# Altium PCB IMX291.PcbDoc
Units mil, origin at the board's own origin, x right, y up, seen from the top; angles counter-clockwise.
Board outline 2450 x 2235 mil, 2 copper layers (Top Layer, Bottom Layer); 66 components, 59 nets, 401 pads, 106 vias.
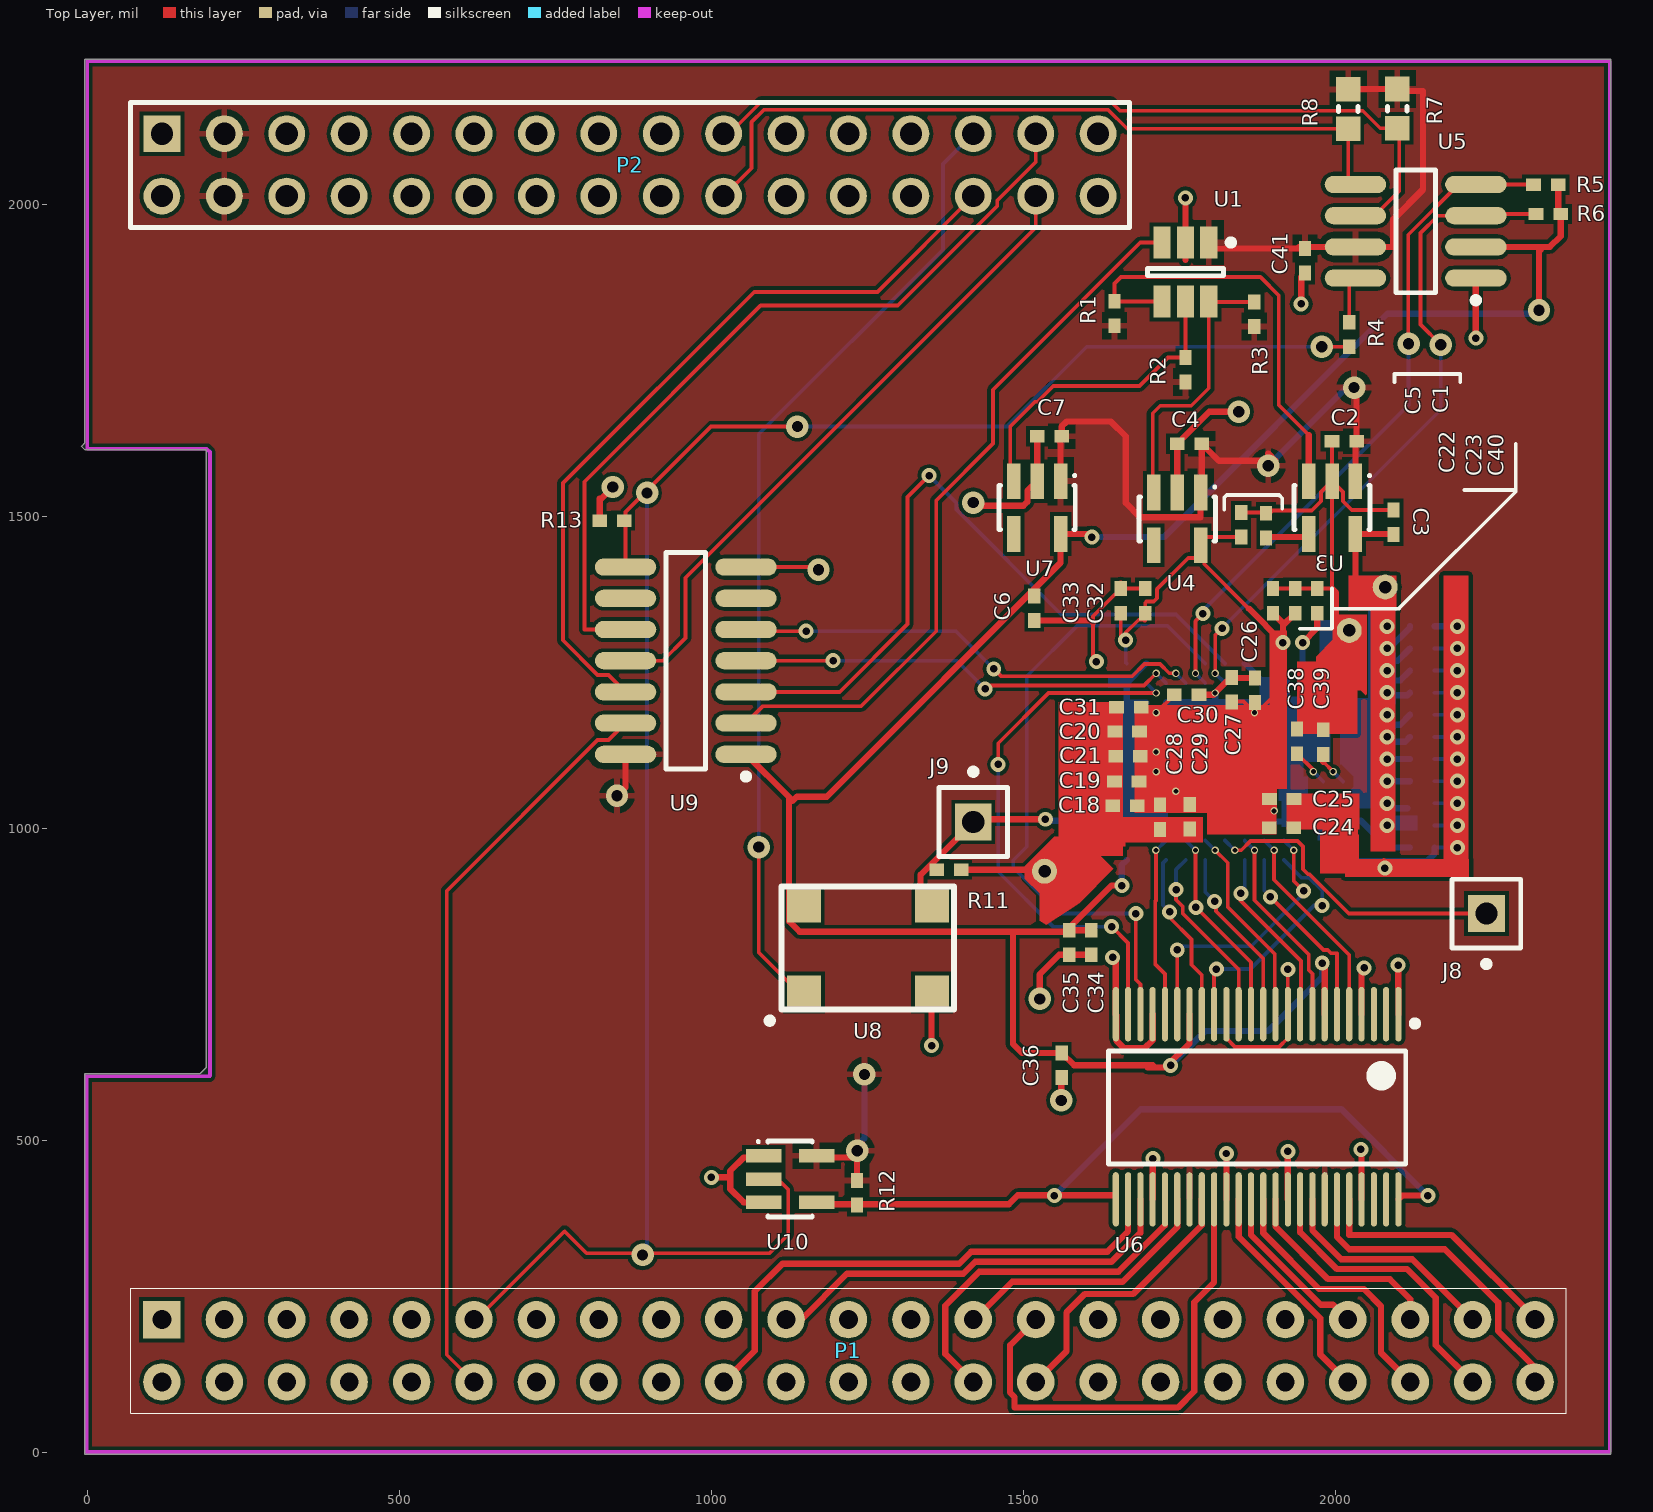
[diagram p0: Top Layer view]
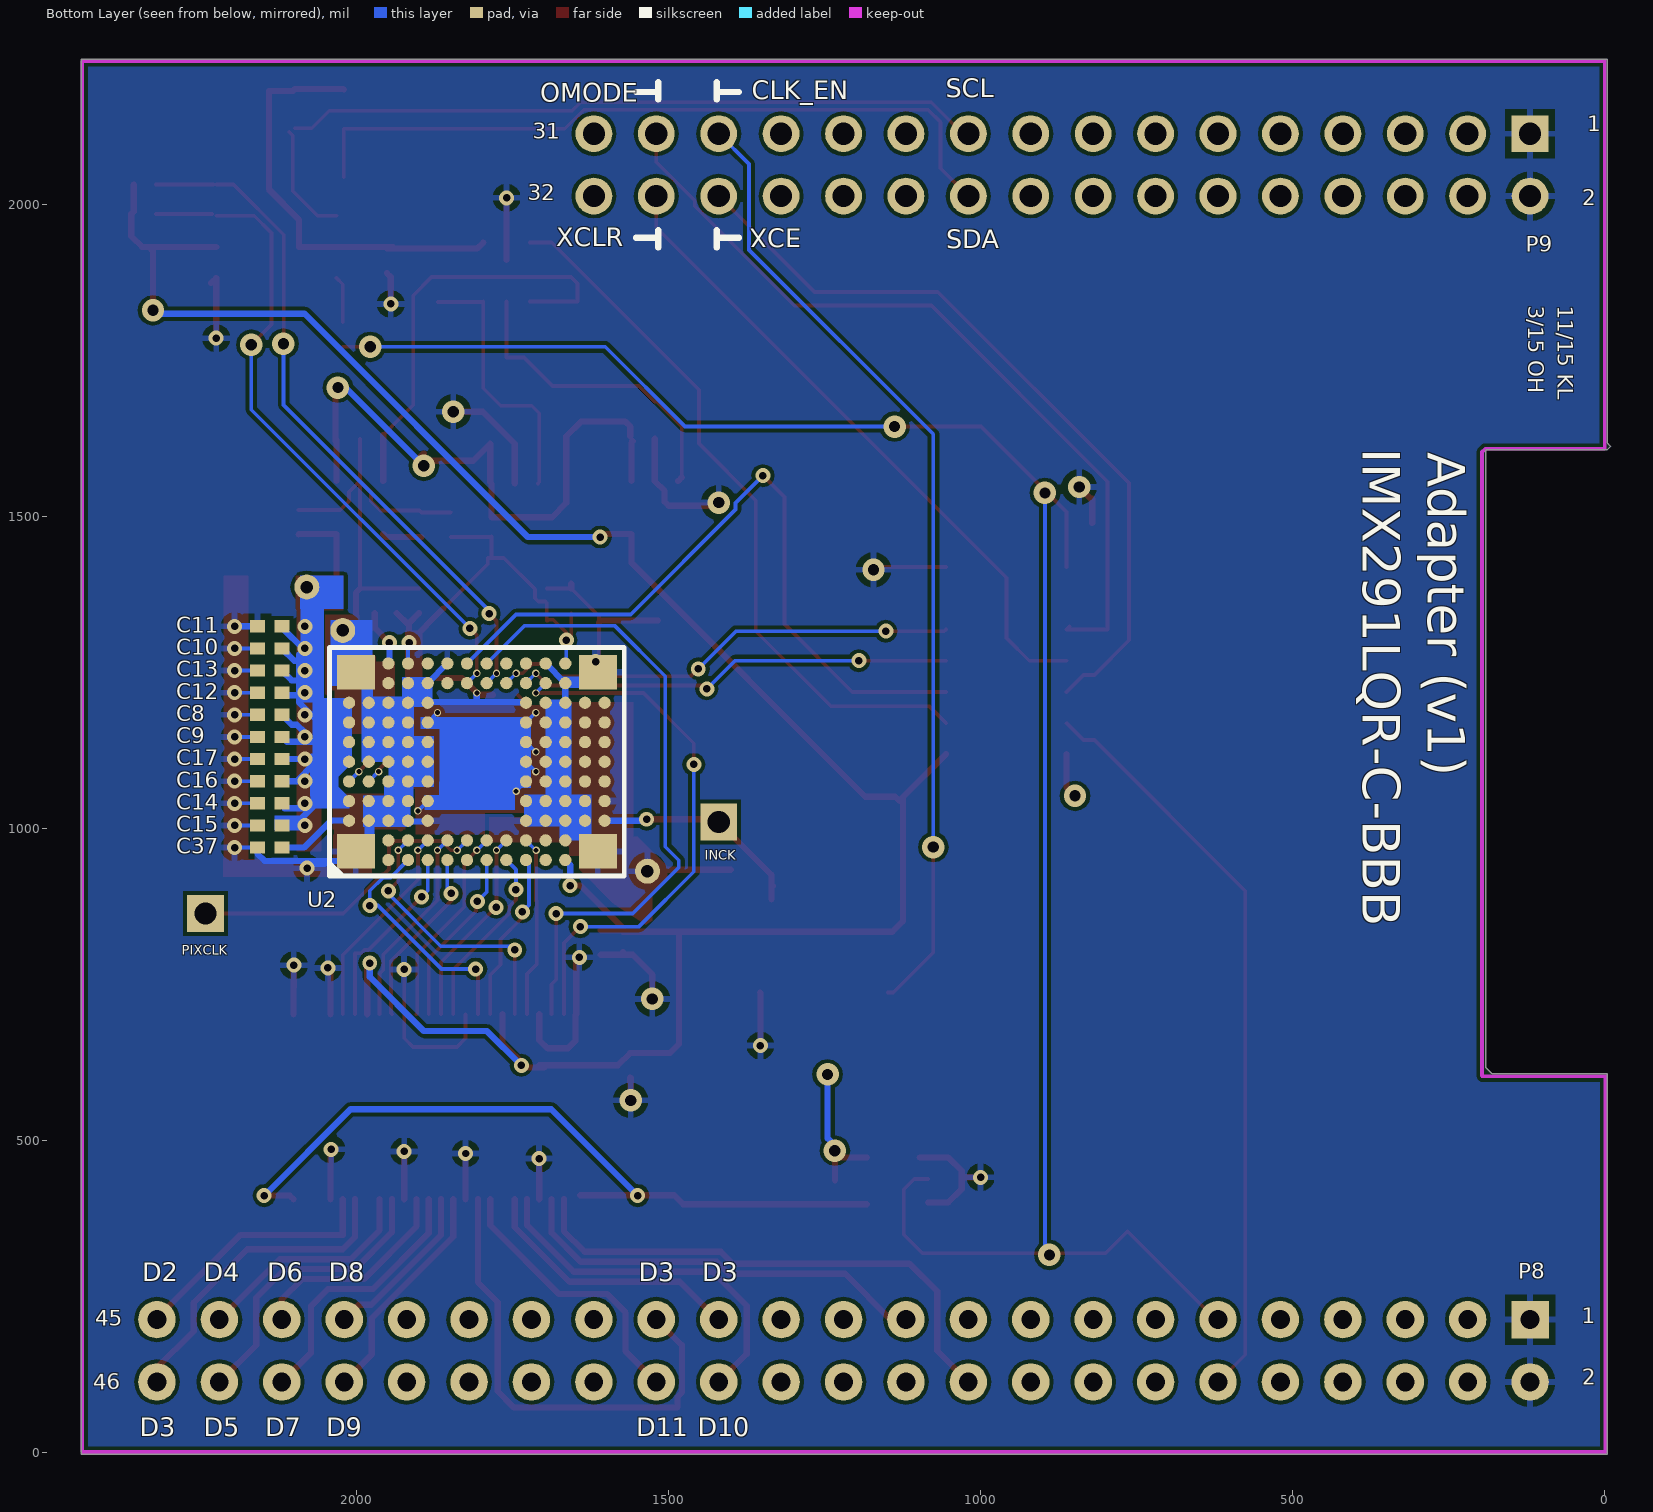
[diagram p1: Bottom Layer view, seen from below]

## Layer stack, top to bottom
Top Solder: solder mask 0.4, Solder Resist, Dk 3.5
Top Layer: signal copper 1.4
Dielectric 1: dielectric 12.6, FR-4, Dk 4.8
Bottom Layer: signal copper 1.4
Bottom Solder: solder mask 0.4, Solder Resist, Dk 3.5

## Board outline
2441.04,2231.97 2441.04,-3.03 -3.96,-3.03 -3.96,606.97 181.04,606.97 191.04,616.97 191.04,1606.97 -3.96,1606.97 -8.96,1611.97 -3.96,1616.97 -3.96,2231.97

## Design rules (kind name [scope] priority, off if disabled: settings)
Clearance [All] p1: gap=6
ComponentClearance [All] p1: gap=2 collisioncheckmode=3 verticalgap=10 showdistances=TRUE
HoleSize [All] p1: absolutevalues=TRUE maxlimit=100 minlimit=12 maxpercent=80.000 minpercent=20.000
MinimumAnnularRing [All] p1: minimumring=6
MinimumSolderMaskSliver [All] p1: minsoldermaskwidth=5
PolygonConnect [All] p1: connectstyle=Relief reliefconductorwidth=10 reliefentries=4 polygonreliefangle="90 Angle" airgapwidth=10
RoutingVias [All] p1: holewidth=28 width=50 viastyle="Through Hole" minholewidth=28 minwidth=50 maxholewidth=28 maxwidth=50
SolderMaskExpansion [All] p1: expansion=4
Width [All] p1: maxlimit=10 minlimit=6 preferedwidth=10
26 further rules are at their usual default settings.

## Components (designator, comment, footprint, x,y, rotation, side; value= is the part's Value field where it differs from the comment)
C1 "10nF" 0402#1 1889,1485 r90 top
C2 "1uF" 0402#1 2014.48,1620.31 r180 top
C3 "1uF" 0402#1 2093.22,1490.39 r270 top
C4 "1uF" 0402#1 1766.45,1616.38 r180 top
C5 "1uF" 0402#1 1849.12,1486.45 r270 top
C6 "1uF" 0402#1 1517.72,1352.76 r90 top
C7 "1uF" 0402#1 1542.04,1628.19 r180 top
C8 "0.1uF" 0402#1 2139.37,1181.89 r0 bottom
C9 "1.0uF" 0402#1 2139.37,1146.46 r0 bottom
C10 "0.1uF" 0402#1 2139.37,1288.19 r180 bottom
C11 "4.7uF" 0402#1 2139.37,1323.62 r180 bottom
C12 "0.1uF" 0402#1 2139.37,1217.32 r180 bottom
C13 "4.7uF" 0402#1 2139.37,1252.76 r180 bottom
C14 "4.7uF" 0402#1 2139.37,1040.16 r180 bottom
C15 "0.1uF" 0402#1 2139.37,1004.72 r180 bottom
C16 "4.7uF" 0402#1 2139.37,1075.59 r180 bottom
C17 "0.1uF" 0402#1 2139.37,1111.02 r180 bottom
C18 "0.01uF" 0402#1 1662.99,1036.22 r0 top
C19 "1.0uF" 0402#1 1665.75,1075.2 r0 top
C20 "0.01uF" 0402#1 1666.54,1155.12 r0 top
C21 "1.0uF" 0402#1 1667.72,1115.35 r0 top
C22 "0.1uF" 0402#1 1900.3,1364.41 r270 top
C23 "4.7uF" 0402#1 1935.74,1364.41 r270 top
C24 "0.1uF" 0402#1 1913.78,1001.18 r180 top
C25 "4.7uF" 0402#1 1914.08,1047.08 r180 top
C26 "0.1uF" 0402#1 1871.26,1221.26 r270 top
C27 "4.7uF" 0402#1 1834.25,1222.05 r270 top
C28 "0.1uF" 0402#1 1719.2,1017.95 r90 top
C29 "4.7uF" 0402#1 1766.93,1018.5 r90 top
C30 "0.1uF" 0402#1 1761.81,1214.17 r180 top
C31 "4.7uF" 0402#1 1669.29,1194.09 r0 top
C32 "0.1uF" 0402#1 1695.58,1364.41 r270 top
C33 "4.7uF" 0402#1 1656.21,1364.41 r270 top
C34 ".01uF" 0402#1 1608.96,817.16 r270 top
C35 "4.7uF" 0402#1 1573.53,817.16 r270 top
C36 "18pF" 0402#1 1561.72,620.31 r90 top
C37 "1uF" 0402#1 2139.37,969.29 r0 bottom
C38 "1uF" 0402#1 1938.58,1139.37 r90 top
C39 "1uF" 0402#1 1980.71,1138.19 r90 top
C40 "0.22uF" 0402#1 1971.17,1364.41 r90 top
C41 "1uF" 0402#2 1951.58,1909.33 r270 top
J8 "PIXCLK" PIN1 2242,863.39 r180 top
J9 "INCK" PIN1 1419.99,1010.08 r0 top
P1 "P8" HEADER23X2 1220,162.97 r0 top
P2 "P9" HDR2X16 120,2112.97 r0 top
R1 "100k" 0402#1 1646.06,1824.8 r270 top
R2 "100k" 0402#2 1759.84,1734.65 r90 top
R3 "100k" 0402#1 1870.08,1823.62 r270 top
R4 "200k" 0402#1 2022.44,1791.22 r90 top
R5 "1k" 0402#1 2337.4,2031.38 r0 top
R6 "1k" 0402#1 2341.34,1984.14 r0 top
R7 "10k" 0603 2099.22,2153.04 r270 top
R8 "10k" 0603 2020.59,2152.4 r270 top
R11 "1K" 0402#1 1381.1,933.86 r180 top
R12 "1K" 0402#1 1233.67,416.22 r90 top
R13 "1K" 0402#1 841.25,1492.99 r0 top
U1 "LM3880" SOT23-6_M 1759.84,1891.34 r270 top
U2 "IMX291" "LGA110C80P14X11_1200X930X350 -Back View" 1807.48,1106.69 r180 top
U3 "LP3985_2.9" DBV005 1994.79,1514.01 r180 top
U4 "LP3990_1.2" DBV005 1746.76,1495.67 r180 top
U5 "PCA9306" D008_M 2128.74,1956.58 r180 top
U6 "SN74AVCH16T245" TSSOP48 2101.09,687.24 r270 top
U7 "LP3990_1.8" DBV005 1522.35,1514.01 r180 top
U8 "DSC1001" DSC1001 1283.87,781.9 r180 top
U9 "TXB0104" TSSOP14_M 959.36,1268.58 r180 top
U10 "SN74LVC1G04" DBV005 1126.58,438.04 r270 top

## Footprints (in the part's own frame and the unit in brackets; to place one, negate y for a bottom-side part, rotate by r counter-clockwise, add the part's x,y. Pads: shape width x height; smd on the part's side, far side on the other; paste and mask are expansions set on the pad)
0402#1 [mm] "Chip Capacitor, Body 1.0x0.5mm, IPC High Density"
  rect 0.6x0.5 smd: 1(-0.5,0) 2(0.5,0)
  body extent -0.55,-0.3 0.55,0.3, height 1.3
0402#2 [mm] "Chip Capacitor, Body 1.0x0.5mm, IPC High Density"
  rect 0.6x0.5 smd: 1(0.5,0) 2(-0.5,0)
  body extent -0.55,-0.3 0.55,0.3, height 1.3
0603 [mm] "Chip Capacitor, 2-Leads, Body 1.6x0.8mm, IPC Medium Density"
  rect 1x1 smd: 1(-0.8,0) 2(0.8,0)
  silkscreen extent -0.1,-0.4 0.1,0.4, body extent -0.9,-0.5 0.9,0.5, height 0.87
D008_M [mm] "8-Pin Small Outline Integrated Circuit 1.27 mm Pitch, IPC Low Density"
  oval 2.5x0.7 smd: 1(-2.45,1.905) 2(-2.45,0.635) 3(-2.45,-0.635) 4(-2.45,-1.905) 5(2.45,-1.905) 6(2.45,-0.635) 7(2.45,0.635) 8(2.45,1.905)
  silkscreen extent -2.58,-2.5 0.8,2.93, body extent -2,-2.5 2,2.5, height 1.75
DBV005 [mm] "SOT-23/SC-74A; 5 Leads; Body 3 x 3 mm, inc. leads (LxW max)"
  rect 0.55x1.45 smd: 1(-0.95,-1.075) 2(0,-1.075) 3(0.95,-1.075) 4(0.95,1.075) 5(-0.95,1.075)
  silkscreen extent -1.58,-1.35 1.55,0.9
DSC1001 [mil]
  rect 55x55 smd paste+0 mask+0: 1(135,45) 2(-70,45) 3(-70,-95) 4(135,-95)
  Top Overlay keep-out lines w10: 171,72 -105,72 -105,-125 171,-125 171,72
  silkscreen extent -105,-125 195,95
HDR2X16 [mm] "Connector; Header; 16x2 Position"
  rect 1.5x1.5 hole 0.9: 1(0,0)
  round 1.5 hole 0.9: 2(0,-2.54) 3(2.54,0) 4(2.54,-2.54) 5(5.08,0) 6(5.08,-2.54) 7(7.62,0) 8(7.62,-2.54) 9(10.16,0) 10(10.16,-2.54) 11(12.7,0) 12(12.7,-2.54) 13(15.24,0) 14(15.24,-2.54) 15(17.78,0) 16(17.78,-2.54) 17(20.32,0) 18(20.32,-2.54) 19(22.86,0) 20(22.86,-2.54) 21(25.4,0) 22(25.4,-2.54) 23(27.94,0) 24(27.94,-2.54) 25(30.48,0) 26(30.48,-2.54) 27(33.02,0) 28(33.02,-2.54) 29(35.56,0) 30(35.56,-2.54) 31(38.1,0) 32(38.1,-2.54)
  silkscreen extent -1.27,-3.81 39.37,1.27
HEADER23X2 [mil] "HEADER23X2"
  rect 60x60 hole 30 mask+2: 1(-1100,50)
  round 60 hole 30 mask+2: 2(-1100,-50) 3(-1000,50) 4(-1000,-50) 5(-900,50) 6(-900,-50) 7(-800,50) 8(-800,-50) 9(-700,50) 10(-700,-50) 11(-600,50) 12(-600,-50) 13(-500,50) 14(-500,-50) 15(-400,50) 16(-400,-50) 17(-300,50) 18(-300,-50) 19(-200,50) 20(-200,-50) 21(-100,50) 22(-100,-50) 23(0,50) 24(0,-50) 25(100,50) 26(100,-50) 27(200,50) 28(200,-50) 29(300,50) 30(300,-50) 31(400,50) 32(400,-50) 33(500,50) 34(500,-50) 35(600,50) 36(600,-50) 37(700,50) 38(700,-50) 39(800,50) 40(800,-50) 41(900,50) 42(900,-50) 43(1000,50) 44(1000,-50) 45(1100,50) 46(1100,-50)
  silkscreen extent -1150,-100 1150,100
"LGA110C80P14X11_1200X930X350 -Back View" [mm]
  rect 1.55x1.4 smd far side: 1(-4.925,3.65) 9(-4.925,-3.65) 106(4.925,3.65) 114(4.925,-3.65)
  round 0.5 smd far side: 2(-5.2,2.4) 3(-5.2,1.6) 4(-5.2,0.8) 5(-5.2,0) 6(-5.2,-0.8) 7(-5.2,-1.6) 8(-5.2,-2.4) 10(-4.4,2.4) 11(-4.4,1.6) 12(-4.4,0.8) 13(-4.4,0) 14(-4.4,-0.8) 15(-4.4,-1.6) 16(-4.4,-2.4) 17(-3.6,4) 18(-3.6,3.2) 19(-3.6,2.4) 20(-3.6,1.6) 21(-3.6,0.8) 22(-3.6,0) 23(-3.6,-0.8) 24(-3.6,-1.6) 25(-3.6,-2.4) 26(-3.6,-3.2) 27(-3.6,-4) 28(-2.8,4) 29(-2.8,3.2) 30(-2.8,2.4) 31(-2.8,1.6) 32(-2.8,0.8) 33(-2.8,0) 34(-2.8,-0.8) 35(-2.8,-1.6) 36(-2.8,-2.4) 37(-2.8,-3.2) 38(-2.8,-4) 39(-2,4) 40(-2,3.2) 41(-2,2.4) 42(-2,1.6) 43(-2,0.8) 44(-2,0) 45(-2,-0.8) 46(-2,-1.6) 47(-2,-2.4) 48(-2,-3.2) 49(-2,-4) 50(-1.2,4) 51(-1.2,3.2) 52(-1.2,-3.2) 53(-1.2,-4) 54(-0.4,4) 55(-0.4,3.2) 56(-0.4,-3.2) 57(-0.4,-4) 58(0.4,4) 59(0.4,3.2) 60(0.4,-3.2) 61(0.4,-4) 62(1.2,4) 63(1.2,3.2) 64(1.2,-3.2) 65(1.2,-4) 66(2,4) 67(2,3.2) 68(2,2.4) 69(2,1.6) 70(2,0.8) 71(2,0) 72(2,-0.8) 73(2,-1.6) 74(2,-2.4) 75(2,-3.2) 76(2,-4) 77(2.8,4) 78(2.8,3.2) 79(2.8,2.4) 80(2.8,1.6) 81(2.8,0.8) 82(2.8,0) 83(2.8,-0.8) 84(2.8,-1.6) 85(2.8,-2.4) 86(2.8,-3.2) 87(2.8,-4) 88(3.6,4) 89(3.6,3.2) 90(3.6,2.4) 91(3.6,1.6) 92(3.6,0.8) 93(3.6,0) 94(3.6,-0.8) 95(3.6,-1.6) 96(3.6,-2.4) 97(3.6,-3.2) 98(3.6,-4) 99(4.4,2.4) 100(4.4,1.6) 101(4.4,0.8) 102(4.4,0) 103(4.4,-0.8) 104(4.4,-1.6) 105(4.4,-2.4) 107(5.2,2.4) 108(5.2,1.6) 109(5.2,0.8) 110(5.2,0) 111(5.2,-0.8) 112(5.2,-1.6) 113(5.2,-2.4)
  body extent -6,-4.65 6,4.65, height 3.5
PIN1 [mm] "Connector; Plug"
  rect 1.5x1.5 hole 0.9: 1(0,0)
  silkscreen extent -1.4,-1.4 1.4,2.17
SOT23-6_M [mm] "SOT23, 6-Leads, Body 2.9x1.6mm, Pitch 0.95mm, Lead Span 2.7mm, IPC Low Density"
  rect 1.3x0.7 smd: 1(-1.2,0.95) 2(-1.2,0) 3(-1.2,-0.95) 4(1.2,-0.95) 5(1.2,0) 6(1.2,0.95)
  silkscreen extent -1.32,-1.55 0.15,1.98, body extent -0.9,-1.55 0.9,1.55, height 1.45
TSSOP14_M [mm] "14-Pin Small Outline Integrated Circuit 1.27 mm Pitch, IPC Low Density"
  oval 2.5x0.7 smd: 1(-2.45,3.81) 2(-2.45,2.54) 3(-2.45,1.27) 4(-2.45,0) 5(-2.45,-1.27) 6(-2.45,-2.54) 7(-2.45,-3.81) 8(2.45,-3.81) 9(2.45,-2.54) 10(2.45,-1.27) 11(2.45,0) 12(2.45,1.27) 13(2.45,2.54) 14(2.45,3.81)
  silkscreen extent -2.58,-4.4 0.8,4.83, body extent -2,-4.38 2,4.38, height 1.75
TSSOP48 [mm]
  oval 2.212x0.25 smd: 1(-0.381,0) 2(-0.381,-0.5) 3(-0.381,-1) 4(-0.381,-1.5) 5(-0.381,-2) 6(-0.381,-2.5) 7(-0.381,-3) 8(-0.381,-3.5) 9(-0.381,-4) 10(-0.381,-4.5) 11(-0.381,-5) 12(-0.381,-5.5) 13(-0.381,-6) 14(-0.381,-6.5) 15(-0.381,-7) 16(-0.381,-7.5) 17(-0.381,-8) 18(-0.381,-8.5) 19(-0.381,-9) 20(-0.381,-9.5) 21(-0.381,-10) 22(-0.381,-10.5) 23(-0.381,-11) 24(-0.381,-11.5) 25(7.154,-11.5) 26(7.154,-11) 27(7.154,-10.5) 28(7.154,-10) 29(7.154,-9.5) 30(7.154,-9) 31(7.154,-8.5) 32(7.154,-8) 33(7.154,-7.5) 34(7.154,-7) 35(7.154,-6.5) 36(7.154,-6) 37(7.154,-5.5) 38(7.154,-5) 39(7.154,-4.5) 40(7.154,-4) 41(7.154,-3.5) 42(7.154,-3) 43(7.154,-2.5) 44(7.154,-2) 45(7.154,-1.5) 46(7.154,-1) 47(7.154,-0.5) 48(7.154,0)
  silkscreen extent -0.12,-11.8 5.72,0.8, body extent 0.33,-11.8 6.48,0.3, height 1.2

## Part data
C1 C2 C3 C4 C5 C6 C7 C8 C9 C10 C11 C12 C13 C14 C15 C16 C17 C18 C19 C20 C21 C22 C23 C24 C25 C26 C27 C28 C29 C30 C31 C32 C33 C34 C35 C36 C37 C38 C39 C40 C41: library part cap
J8 J9: library part Socket, "Socket"
P1: library part HDR_46_F_2_0.1_0.1, "CONN HEADER FMAL 46PS.1\" DL GOLD"
P2: library part "Header 16X2", "Header, 16-Pin, Dual row"
R1 R2 R3 R4 R5 R6 R7 R8: library part Res, "resistor"
R11 R12 R13: library part res
U3: library part LP3985
U4 U7: library part LP3990

## Free pads (board coordinates)
  round 40 hole 20: 1(2022.35,1317.16) 1(2079.92,1386.61) 2(1534.16,931.34)

## Via types
v1: diameter 24, hole 12, Top Layer to Bottom Layer, 66 vias
v2: diameter 11.81, hole 7.87, Top Layer to Bottom Layer, 21 vias
v3: diameter 36, hole 18, Top Layer to Bottom Layer, 19 vias

## Nets (pads, with @x,y where several pads share a name; then routed paths per layer and width w, separated by ;. In a path a pad name is that pad's centre, name@x,y a point inside that pad or via, vN(x,y) a via of type N, cw(c..) or ccw(c..) an arc to the next point about the centre after c; other vN are vias at no path point)
1.2V: C5.2 C18.2 C19.2 C20.2 C21.2 C22.2 C23.2 C24.2 C25.2 C26.2 C27.2 C28.2 C29.2 C30.2 C31.2 C32.2 C33.2 U2.38 U2.42 U2.46 U2.70 U2.71 U2.72 U2.73 U2.98 U4.5 | length 1377.2
  Top Layer w6: C33.2 1656.21,1309.29 v1(1664.08,1301.42) 1664.08,1313.23 1684.96,1334.1 1693.16,1334.1 1694.36,1332.91 C32.2@1695.58,1332.91 ; C18.2 1712.99,1066.54 v2(1712.99,1090.94) 1697.24,1075.2 C19.2 ; C20.2 1712.99,1128.35 v2(1712.99,1122.44) 1694.49,1122.44 C21.2 ; C31.2@1690.94,1190.94 1696.46,1185.43 v2(1712.99,1185.43) 1713.39,1185.43 C30.2 ; C32.2 C32.2@1695.58,1332.91 ; C28.2 1741.01,1059.45 v2(1744.49,1059.45) 1745.67,1059.45 C29.2 ; C27.2@1834.25,1203.15 1852.76,1203.15 v2(1870.47,1185.43) 1874.87,1185.43 1916.05,1226.61 v1(1916.05,1297.48) ; C5.2 1785.15,1466.77 1784.16,1467.75 U4.5@1784.16,1433.31 ; 1861.1,1352.43 1790.07,1423.46 1790.07,1433.31 U4.5@1784.16,1433.31 ; C24.2 1894.09,1020.08 v2(1901.97,1027.95) 1901.97,1039.51 C25.2 ; C32.2@1695.58,1332.91 1695.58,1361.31 1697.55,1363.28 1709.15,1363.28 1714.42,1368.55 1714.42,1383.25 1764.48,1433.31 U4.5@1784.16,1433.31
  Top Layer w10: 1861.1,1352.43 v1(1916.05,1297.48) 1916.05,1325.04 C23.2 ; C22.2 1916.05,1328.97
  Bottom Layer w6: v1(1664.08,1301.42) 1664.08,1265.84 U2.98 ; v2(1712.99,1090.94) U2.71 ; v2(1712.99,1122.44) U2.72 ; v2(1712.99,1185.43) U2.73 ; U2.70 v2(1744.49,1059.45) ; v2(1870.47,1185.43) U2.46 ; U2.42 v2(1901.97,1027.95) ; v1(1916.05,1297.48) 1917.72,1295.81 U2.38
1.8V: C6.2 C34.1 C35.1 C36.2 R5.2 R6.2 U2.88 U5.2 U6.7 U6.18 U7.5 U8.4 U9.1 | length 3783.8
  Top Layer w10: U9.1 1124.83,1049.56 ; C35.1@1573.53,840.52 1641.3,908.28 v1(1657.91,908.28) ; v1@1605.03,1471.69 U7.5 1559.75,1425.43 1185.05,1050.73 1137.34,1050.73 1130.5,1043.89 1124.83,1049.56 ; C34.1 C35.1 1573.53,834.16 1483.49,834.16 ; 1699.48,617.02 1727.72,617.02 1766.45,655.75 U6.18 ; 1707.39,620.31 1581.41,620.31 C36.2 1498.1,640 1483.49,654.6 1483.49,702.02 1483.49,834.16 ; v1(1979.07,784.23) 1982.98,780.32 U6.7 ; U5.2 2333.07,1931.58 ; v3(2326.38,1829.92) 2326.38,1924.88 2333.07,1931.58 ; R5.2 2357.09,1988.07 R6.2 2361.03,1948.7 2343.9,1931.58 2333.07,1931.58 ; 1124.83,1049.56 1124.83,851.02 1141.69,834.16 1483.49,834.16
  Bottom Layer w10: v1(1609.95,1466.77) 1725.83,1466.77 2083.46,1824.41 2320.47,1824.41 v3@2324.41,1820.47 ; v1(1657.91,908.28) 1657.91,941.37 U2.88 ; v1(1736.3,620.31) 1791.3,675.32 1892.46,675.32 1979.07,761.92 v1(1979.07,784.23)
2.9V: C3.2 C8.1 C9.1 C10.2 C11.2 C12.2 C13.2 C14.2 C15.2 C16.2 C17.2 pad.1@2079.92,1386.61 U2.3 U2.5 U2.6 U2.7 U2.8 U3.5 | length 1323.6
  Top Layer w10: 2032.19,1393.94 U3.5 2092.23,1471.69 C3.2
  Bottom Layer w10: 2032.19,1393.94 2084.25,1341.88 v1@2084.25,1286.22 ; 2052.76,1201.57 2013.39,1201.57 U2.7@2013.39,1170.08 ; 2068.5,1103.15 2096.06,1075.59 C16.2 ; v1@2072.44,1111.02 C17.2 ; v1@2072.44,1114.96 2064.57,1107.09 U2.5@2013.39,1107.09 ; C14.2@2115.75,1032.28 2072.44,1032.28 ; C15.2 2100,1004.72 2072.44,1032.28 ; C9.1 2111.81,1138.58 v1@2084.25,1138.58 ; C8.1 2103.94,1166.14 2096.06,1166.14 2084.25,1154.33 v1@2084.25,1138.58 ; C12.2 2115.75,1213.39 v1@2092.13,1213.39 ; C13.2 2103.94,1237.01 2092.13,1237.01 ; C10.2 2100,1268.5 2092.13,1268.5 ; C11.2 2119.68,1321.65 v1@2084.25,1286.22 ; U2.5@2013.39,1107.09 U2.6@2013.39,1138.58 ; U2.5@2013.39,1107.09 2013.39,1105.07 2034.23,1084.22 2034.23,1064.94 2013.39,1044.09 2060.63,1044.09 2072.44,1032.28 ; U2.6@2013.39,1138.58 v1@2084.25,1138.58 ; U2.6@2013.39,1138.58 U2.7@2013.39,1170.08 ; U2.7@2013.39,1170.08 2060.63,1170.08 2092.13,1201.57 v1@2092.13,1213.39 ; v1@2084.25,1286.22 2092.13,1278.35 2092.13,1268.5 ; v1@2092.13,1213.39 2092.13,1237.01 ; 2092.13,1237.01 2092.13,1268.5
  other v1: 2083.13,1004.72 2083.13,1040.16 2083.13,1075.59 2083.13,1111.02 2083.13,1146.46 2083.13,1181.89 2083.13,1217.32 2083.13,1252.76 2083.13,1288.19 2083.13,1323.62
3.3V: C2.1 C4.1 C7.1 C41.2 P2.3 P2.4 R1.2 R2.2 R3.2 R7.1 R8.1 R12.2 U1.1 U3.1 U4.1 U5.7 U6.31 U6.42 U7.1 U9.14 U10.5 | length 2055.6
  Top Layer w10: v3(849.12,1052.04) 862.9,1065.82 U9.14 ; U10.5@1182.78,472.68 v3@1233.67,472.68 ; R12.2 v3@1233.67,472.68 ; v3(1233.89,483.64) 1233.67,483.42 v3@1233.67,472.68 ; v3@1233.89,486.45 1241.28,493.85 1242.45,493.85 1234.02,485.43 v3@1234.02,483.64 ; C7.1@1557.78,1620.31 1559.75,1618.34 U7.1 ; C7.1 1561.72,1643.94 1569.59,1651.81 1640.46,1651.81 1664.08,1628.19 1664.08,1521.35 1686.98,1498.45 1784.16,1498.45 U4.1 1784.16,1552.4 1786.13,1554.37 C4.1@1786.13,1612.44 ; C4.1 1813.53,1588.98 1904.08,1588.98 1892.43,1600.63 v3(1892.43,1580.94) ; U1.1 1806.81,1929.02 C41.2 ; C41.2@1942.32,1931.58 U5.7 2092.36,1931.58 2092.5,1931.72 2092.5,1975.51 2140.5,2023.52 2140.5,2181.57 2102.18,2181.57 R7.1 2021.22,2184.53 R8.1 ; U3.1 2032.19,1622.28 C2.1 v3@2034.16,1699.05
  Bottom Layer w10: v3@1237.31,493.85 1236.8,494.36 1245.63,503.2 v3(1245.63,605.83) ; v3(1892.43,1580.94) v3@2022.35,1710.86
  other v3: 2030.13,1706.25
CLK_ENABLE: P2.27 U8.1 | length 1553.8
  Top Layer w6: v3(1076.09,970.03) 1076.09,801 1140.2,736.9 U8.1
  Bottom Layer w6: v3(1076.09,970.03) 1076.09,1631.6 1371.26,1926.77 1371.26,2064.23 P2.27
D0: P1.27 U6.30 | length 432.5
  Top Layer w10: P1.27 1421.63,212.97 1482.28,273.62 1659.19,273.62 1746.76,361.19 U6.30
D0B: U2.29 U6.19 | length 432
  Top Layer w6: U6.19 v1(1746.76,805.35) ; v2(1933.46,964.96) 1933.46,915.75 v1(1949.21,900)
  Bottom Layer w6: v1(1746.76,805.35) 1752.67,811.26 1865.26,811.26 v1@1945.97,891.97 ; U2.29 v2(1933.46,964.96)
D1: P1.29 U6.33 | length 780.3
  Top Layer w10: P1.29 1479,171.97 1479,95.99 1486.14,88.85 1486.14,71.97 1747.97,71.97 1774,98 1774,240.81 1805.82,272.62 U6.33
D1B: U2.28 U6.16 | length 405.2
  Top Layer w6: U6.16 1805.82,781.73 1809.36,778.19 v1(1809.36,774.64)
  Bottom Layer w6: v1(1809.36,774.64) 1864.35,774.64 1965.92,876.22 v1(1979.04,876.22) 1979.04,899.87 1957.91,921 1945.93,921 U2.28
D2: P1.45 U6.44 | length 412
  Top Layer w10: U6.44 2022.35,348.52 2186.31,348.52 2320,214.82 P1.45
D3: P1.46 U6.43 | length 513.8
  Top Layer w10: U6.43 2002.67,345.37 2022.22,325.81 2175.37,325.81 2261,240.18 2261,194.6 2320,135.6 P1.46
D4: P1.43 U6.41 | length 365.6
  Top Layer w10: U6.41 1963.3,355.88 2009.36,309.81 2123.16,309.81 P1.43
D5: P1.44 U6.40 | length 472.8
  Top Layer w10: U6.40 1943.61,352.94 2002.74,293.81 2114.96,293.81 2161,247.77 2161,171.97 P1.44
D6: P1.41 U6.38 | length 340.1
  Top Layer w10: U6.38 1904.24,361.9 1988.33,277.81 2087.54,277.81 2120,245.35 P1.41
D7: P1.42 U6.37 | length 432.1
  Top Layer w10: U6.37 1884.56,351.66 1974.4,261.81 2046.08,261.81 2073.23,234.67 2073.23,159.75 P1.42
D8: P1.39 U6.36 | length 268.2
  Top Layer w10: U6.36 1864.87,348.71 1977,236.58 1996.39,236.58 P1.39
D9: P1.40 U6.35 | length 365
  Top Layer w10: U6.35 1845.19,345.77 1975.98,214.97 1975.98,156.99 P1.40
D10: P1.28 U6.29 | length 587.7
  Top Layer w10: P1.28 1375,157.97 1375,235 1429.62,289.62 1652.56,289.62 1727.08,364.14 U6.29
D10G: U2.67 U6.20 | length 292.4
  Top Layer w6: v2(1712.59,964.96) 1712.59,884.25 1711.33,882.98 1711.33,782.52 1727.08,766.77 U6.20
  Bottom Layer w6: v2(1712.59,964.96) 1712.99,964.96 U2.67
D11: P1.30 U6.32 | length 448
  Top Layer w10: P1.30 1569.29,162.26 1569.29,224.41 1598.85,253.97 1675.97,253.97 1786.13,364.14 U6.32
FLAG1: R3.1 U1.6 U4.3 | length 432
  Top Layer w6: U4.3@1709.36,1552.4 1707.39,1554.37 1707.39,1664.96 1719.59,1677.17 1769.29,1677.17 1797.24,1705.12 U1.6 1798.03,1843.31 R3.1
FLAG2: R2.1 U1.5 U7.3 | length 506.3
  Top Layer w6: U7.3@1479.04,1562.24 1479.04,1643.94 1518.41,1683.31 1522.35,1683.31 1547.94,1708.9 1686.45,1708.9 1731.89,1754.33 R2.1 U1.5
  Top Layer w10: U7.3@1479.04,1562.24 U7.3
FLAG3: R1.1 U1.4 U3.3 | length 702.4
  Top Layer w6: U1.4 1646.46,1844.09 R1.1 1646.06,1872.83 1656.69,1883.46 1879.92,1883.46 1909.46,1853.93 1909.46,1678.09 1957.39,1630.16
  Top Layer w10: U3.3 1957.39,1630.16
FRAME_VALID: U2.61 U6.22 | length 1051.2
  Top Layer w6: v1(1680.32,863.39) 1680.32,757.62 1687.71,750.23 U6.22
  Bottom Layer w6: v1(1680.32,863.39) 1680.18,863.52 1557.74,863.52 1483.86,937.4 1483.86,948.82 1505.51,970.47 1505.51,1243.7 1586.22,1324.41 1731.5,1324.41 U2.61
FRAME_VALID3.3: P1.21 U6.27 | length 679
  Top Layer w10: P1.21 1144.07,212.97 1217.57,286.47 1403.84,286.47 1422.99,305.62 1641.46,305.62 1687.71,351.87 U6.27
GND: C1.2 C2.2 C3.1 C4.2 C5.1 C6.1 C7.2 C8.2 C9.2 C10.1 C11.1 C12.1 C13.1 C14.1 C15.1 C16.1 C17.1 C18.1 C19.1 C20.1 C21.1 C22.1 C23.1 C24.1 C25.1 C26.1 C27.1 C28.1 C29.1 C30.1 C31.1 C32.1 C33.1 C34.2 C35.2 C36.1 C37.2 C38.2 C39.2 C40.2 C41.1 P1.1 P1.2 P2.1 P2.2 pad.1@2022.35,1317.16 pad.2 R11.1 R13.1 U1.2 U2.1 U2.9 U2.10 U2.11 U2.13 U2.14 U2.15 U2.16 U2.19 U2.20 U2.21 U2.22 U2.23 U2.24 U2.25 U2.30 U2.31 U2.32 U2.33 U2.34 U2.35 U2.36 U2.37 U2.41 U2.43 U2.44 U2.45 U2.47 U2.48 U2.53 U2.68 U2.69 U2.74 U2.79 U2.80 U2.81 U2.82 U2.83 U2.84 U2.85 U2.87 U2.89 U2.90 U2.91 U2.92 U2.93 U2.94 U2.95 U2.96 U2.97 U2.99 U2.100 U2.106 U2.108 U2.114 U3.2 U4.2 U5.1 U6.1 U6.4 U6.10 U6.15 U6.21 U6.24 U6.28 U6.34 U6.39 U6.45 U7.2 U8.2 U9.7 U10.1 U10.3 | length 4520.5
  Top Layer w6: U9.7@1055.42,1418.19 U9.7 1167.63,1418.58 v3(1171.96,1414.25) ; 1611.92,960.86 1634.56,960.86 ; v1@1611.92,1267.83 1611.92,1329.53 1611.92,1339.8 C33.1 C32.1 ; U6.15 1825.5,663.62 1839.42,649.7 1910.01,649.7 1923.93,663.62 U6.10 1923.93,773.91 v1(1924.03,774.02) ; C5.1 1896.37,1506.14 1899.46,1509.23 1962.39,1509.23 1977.22,1524.07 1977.22,1538.76 U3.2 ; C22.1 1994.79,1384.09 U3.2 ; C2.2@1994.79,1624.25 U3.2 ; 2077.81,949.61 v1@2084.34,943.07 ; C3.1 2026.36,1510.08 2012.37,1524.07 2012.37,1538.76 U3.2
  Top Layer w10: R13.1@821.56,1489.05 821.56,1528.42 823.96,1528.42 v3(842.44,1546.9) ; v1(1000.39,440.94) 1029.32,440.94 1030.5,442.13 ; U10.3 1052.01,400.64 1030.5,422.14 1030.5,442.13 ; U10.1@1098.14,472.68 1052.07,472.68 1030.5,451.11 1030.5,442.13 ; v3(1171.96,1414.25) v3@1179.83,1414.25 ; v1(1353.15,651.97) 1353.15,736.17 U8.2 ; R11.1 1531.64,933.86 pad.2 ; v3(1419.99,1521.89) 1425.08,1516.79 1500.33,1516.79 1506.78,1523.24 1506.78,1540.76 U7.2 C7.2@1522.35,1624.25 ; C6.1 1608.37,1333.07 1611.92,1329.53 ; v3(1526.29,726.61) 1526.29,765.98 1557.78,797.48 C35.2@1569.59,797.48 ; v3(1561.02,564.17) 1561.02,599.93 C36.1 C36.1@1561.72,592.75 ; C35.2 C35.2@1577.47,797.48 ; C35.2@1573.53,801.42 C35.2@1577.47,797.48 ; C34.2 C35.2@1577.47,797.48 ; v1@1616.84,1262.05 1617.27,1262.47 v1(1617.27,1267.05) ; 1638.1,1087.24 C19.1@1642.04,1083.31 ; v1(1643.31,793.31) 1648.34,788.28 U6.24 ; U6.24@1649.44,701.14 1649.44,659.68 1661.43,647.7 1694.3,647.7 1707.39,660.79 U6.21 ; C33.1 C33.1@1656.21,1391.97 ; U6.28 v1@1707.39,460.3 ; U4.2@1746.76,1552.4 C4.2 1797.94,1667.56 v3(1845.19,1667.56) ; 1759.84,1911.02 U1.2 v1(1759.84,2010.24) ; C30.1 1804.72,1214.17 v2(1807.48,1216.93) 1831.5,1240.94 C26.1 ; U6.34 v1(1825.5,479.04) ; U6.39 v1(1923.93,482.37) ; C24.1@1929.83,999.84 1953.45,1023.46 1953.45,1027.4 C25.1 ; v1(1945.28,1840.16) 1945.28,1883.35 C41.1 ; 1994.79,1384.09 2000.95,1377.93 2000.95,1338.56 ; 1999.71,960.86 2015.27,945.31 ; v1(2040.94,485.83) 2042.04,484.74 U6.45 ; U6.4 2042.04,772.35 v1(2046.06,776.38) ; v1(2100.79,780.71) 2100.79,745.19 2101.09,744.88 U6.1 ; v1(2225.2,1785.32) U5.1 U5.1@2232.88,1873.9
  Bottom Layer w6: C37.2 v1(2195.61,969.29) ; C15.1 v1(2195.61,1004.72) ; C14.1 v1(2195.61,1040.16) ; C16.1 v1(2195.61,1075.59) ; C17.1 v1(2195.61,1111.02) ; C9.2 v1(2195.61,1146.46) ; C8.2 v1(2195.61,1181.89) ; C12.1 v1(2195.61,1217.32) ; C13.1 v1(2195.61,1252.76) ; C10.1 v1(2195.61,1288.19)
  Bottom Layer w10: U2.85 U2.96 U2.97 U2.87 ; U2.74 1729.9,1202.34 1811.42,1202.34 ; v2(1807.48,1216.93) 1807.48,1206.28 1811.42,1202.34 ; U2.53 U2.48 ; U2.41 1887.38,1011.05 1916.56,1011.05 U2.30 ; U2.47 1885.06,1202.34 1811.42,1202.34 ; U2.1@2018.12,947.83 2147.24,947.83 2159.06,959.64 C37.2 ; 2051.42,943.07 v1@2084.34,943.07 ; C11.1 v1(2195.61,1323.62)
  other v1: 1707.87,470.87 2079.53,936.22
INCK: J9.1 R11.2 U2.107 U8.3 | length 346.9
  Top Layer w10: 1333.54,907.48 1335.5,909.45 ; U8.3@1335.5,886.59 1335.5,909.45 ; v1(1535.43,1014.57) 1424.48,1014.57 J9.1 1335.5,925.59 1335.5,909.45
  Bottom Layer w10: v1(1535.43,1014.57) 1537.8,1012.2 U2.107
LINE_VALID: U2.86 U6.23 | length 884.2
  Top Layer w6: v1(1459.84,1102.36) 1459.84,1136.22 1540.55,1216.93 v2(1712.99,1216.93) ; v1(1641.73,842.52) 1668.02,816.23 U6.23
  Bottom Layer w6: v1(1459.84,1102.36) 1459.84,930.32 1547.64,842.52 v1(1641.73,842.52) ; U2.86 v2(1712.99,1216.93)
LINE_VALID3.3: P1.20 U6.26 | length 854.7
  Top Layer w10: P1.20 1070,162.97 1070,258.19 1114.28,302.47 1397.22,302.47 1416.37,321.62 1634.83,321.62 1668.02,354.81 U6.26
NetC1_1: C1.1 U3.4 | length 63.1
  Top Layer w10: C1.1@1896.37,1466.77 1952.47,1466.77 U3.4
NetC37_1: C37.1 U2.2 | length 124.2
  Bottom Layer w10: U2.2@2013.39,1012.6 2040.95,1012.6 2084.25,969.29 C37.1
NetC38_1: C38.1 U2.12 | length 61.9
  Top Layer w6: C38.1 1964.96,1093.31 v2(1964.96,1090.94)
  Bottom Layer w6: v2(1964.96,1090.94) U2.12
NetC39_1: C39.1 U2.4 | length 56.4
  Top Layer w6: 1980.71,1106.69 v2(1996.46,1090.94)
  Top Layer w10: 1980.71,1106.69 C39.1
  Bottom Layer w6: v2(1996.46,1090.94) U2.4
NetC40_1: C40.1 U2.27 | length 91
  Top Layer w10: v1(1947.55,1297.48) 1971.17,1321.1 C40.1
  Bottom Layer w10: v1(1947.55,1297.48) 1947.55,1265.84 U2.27
NetJ8_1: J8.1 U2.55 | length 501.3
  Top Layer w6: v2(1838.98,964.96) 1849.39,964.96 1864.3,979.87 1939.64,979.87 1948.37,971.13 1948.37,934.31 1956.3,926.38 1958.58,926.38 2021.57,863.39 J8.1
  Bottom Layer w6: U2.55 v2(1838.98,964.96)
NetR4_2: R4.2 U5.8 | length 74.7
  Top Layer w6: R4.2 2022.44,1871.73 U5.8
NetR12_1: R12.1 U6.25 U6.48 U10.4 | length 1227.7
  Top Layer w10: U10.4@1182.78,397.87 1477.08,397.87 1491.35,412.15 1641.77,412.15 ; U6.48 2107.15,411.65 v1(2148.34,411.65)
  Bottom Layer w10: v1(1549.91,411.65) 1688.27,550.01 2009.97,550.01 v1(2148.34,411.65)
NetU2_39: U2.39 U6.6 | length 304.7
  Top Layer w6: v1(1896.06,890.16) 1980.99,805.23 1987.77,805.23 1993.16,799.84 2002.67,799.84 U6.6
  Bottom Layer w6: U2.39 1886.22,900 v1(1896.06,890.16)
NetU2_40: U2.40 U6.5 | length 334.9
  Top Layer w6: v2(1901.97,964.96) 1901.97,917.5 2022.35,797.12 U6.5
  Bottom Layer w6: U2.40 v2(1901.97,964.96)
NetU2_50: U2.50 U6.9 | length 290.5
  Top Layer w6: v1(1848.82,895.67) 1848.82,885.17 1848.03,884.39 1945.03,787.39 1945.03,703.66 U6.9
  Bottom Layer w6: v1(1848.82,895.67) 1854.72,901.58 U2.50
NetU2_51: U2.51 U6.8 | length 323.4
  Top Layer w6: v2(1870.47,964.96) 1870.47,884.79 1957.48,797.78 1957.48,772.89 1963.3,767.08 U6.8
  Bottom Layer w6: U2.51 v2(1870.47,964.96)
NetU2_58: U2.58 U6.12 | length 285.4
  Top Layer w6: v1(1806.69,883.07) 1808.66,881.1 1808.66,867.32 1884.56,791.43 U6.12
  Bottom Layer w6: U2.58 1791.73,898.03 v1(1806.69,883.07)
NetU2_59: U2.59 U6.11 | length 325.1
  Top Layer w6: v2(1807.48,964.96) 1827.69,944.75 1827.69,874.03 1903.03,798.69 1903.03,703.45 U6.11
  Bottom Layer w6: U2.59 v2(1807.48,964.96)
NetU2_62: U2.62 U6.14 | length 294.9
  Top Layer w6: v1(1744.88,901.97) 1744.88,885.6 1755.65,874.84 1755.65,863.4 1845.19,773.86 U6.14
  Bottom Layer w6: v1(1744.88,901.97) 1744.88,933.86 U2.62
NetU2_63: U2.63 U6.13 | length 322.4
  Top Layer w6: v2(1775.98,964.96) 1775.98,874.14 v1(1776.67,873.46) 1776.67,873.75 1864.87,785.55 U6.13
  Bottom Layer w6: U2.63 v2(1775.98,964.96)
NetU2_66: U2.66 U6.17 | length 274.8
  Top Layer w6: v1(1734.65,866.14) 1734.65,856.84 1769.68,821.8 1769.68,781.5 1786.13,765.05 U6.17
  Bottom Layer w6: v1@1728.74,872.05 1723.88,876.91 1723.88,944.35 U2.66
  Bottom Layer w10: v1@1728.74,872.05 v1(1734.65,866.14)
OE_SHIFTERS: P1.11 R4.1 R13.2 U9.8 U10.2 | length 3288.6
  Top Layer w6: P1.11 623.78,212.97 765.25,354.44 800.47,319.21 1093.58,319.21 1123.41,349.04 1123.41,421.44 1106.8,438.04 U10.2 ; U9.8 862.9,1506.77 999.83,1643.7 v3(1138.19,1643.7) ; v3(1978.23,1771.54) R4.1
  Bottom Layer w6: v3(890.16,316.54) 897.24,323.62 v3(897.24,1537.4) ; v3(1138.19,1643.7) 1474.02,1643.7 1601.85,1771.54 v3(1978.23,1771.54)
OMODE: U2.64 U9.5 | length 756.5
  Top Layer w6: U9.5 1058.57,1315.82 v1(1152.27,1315.82) ; v1(1452.76,1255.51) 1464.17,1244.09 1464.17,1243.7 1674.8,1243.7 1694.43,1263.33 1719.17,1263.33 1734.07,1248.43 v2(1744.49,1248.43)
  Bottom Layer w6: v1(1152.27,1315.82) 1392.44,1315.82 v1(1452.76,1255.51) ; v2(1744.49,1248.43) U2.64
OMODE3.3: P2.29 U9.10 | length 1295.5
  Top Layer w6: U9.10@857.78,1323.7 U9.10 797.17,1318.58 797.17,1555.44 1079.28,1837.55 1299.07,1837.55 1458.53,1997.01 1458.53,2005.98 1520,2067.46 P2.29
PWR_EN: U1.3 U9.2 | length 1158.9
  Top Layer w6: U9.2 1083.04,1195.8 1240.46,1195.8 1360.48,1315.82 1360.48,1525.37 1451.48,1616.38 1451.48,1702.71 1687.36,1938.58 U1.3
PWR_EN3.3: P1.12 U9.13 | length 1202.7
  Top Layer w6: P1.12 576.38,156.6 576.38,899.7 818.03,1141.36 835.68,1141.36 U9.13
SCL1.8V: R6.1 U2.56 U5.3 | length 1080.8
  Top Layer w6: v2(1807.48,1248.43) 1807.48,1309.45 v1(1818.5,1320.47) ; v3(2168.85,1774.83) 2136.62,1807.07 2136.62,1953.96 2164.23,1981.58 U5.3 ; U5.3@2231.7,1984.14 R6.1
  Bottom Layer w6: v2(1807.48,1248.43) U2.56 ; v1(1818.5,1320.47) 2168.85,1670.82 v3(2168.85,1774.83)
SCL3.3V: P2.19 R7.2 U5.6 | length 1301.3
  Top Layer w6: P2.19 1029.05,2112.97 1079.58,2163.5 1640.93,2163.5 1654.84,2149.59 2044,2149.59 2072.05,2121.54 R7.2 ; U5.6 2062.69,1981.58 2102.42,2021.31 2102.42,2110.28 R7.2@2108.25,2116.11
SDA1.8V: R5.1 U2.60 U5.4 | length 1109.4
  Top Layer w6: v2(1775.98,1248.43) 1775.98,1331.98 v1@1784.94,1340.94 ; v1(1788,1344) v1@1791.85,1340.15 ; v3(2117.42,1776.39) 2116.89,1776.91 2116.89,1951.21 2197.26,2031.58 U5.4 ; U5.4@2229.33,2031.38 R5.1 R5.1@2321.66,2031.38
  Bottom Layer w6: v2(1775.98,1248.43) U2.60 ; v1(1788,1344) 1791.85,1340.15 1791.85,1352.85 2117.42,1678.42 v3(2117.42,1776.39)
SDA3.3V: P2.20 R8.2 U5.5 | length 1191.6
  Top Layer w6: P2.20 1064.52,2057.49 1064.52,2131.48 1084.55,2151.5 1635.96,2151.5 1666.55,2120.91 R8.2 U5.5@2020.59,2043.28
XCE: U2.57 U9.3 | length 1161.1
  Top Layer w6: U9.3 1206,1218.58 1314.62,1327.2 1314.62,1530.7 v1(1349.12,1565.2)
  Bottom Layer w6: v1(1349.12,1565.2) 1392.99,1521.33 1392.99,1510.7 1560.94,1342.75 1744.65,1342.75 U2.57
XCE3.3: P2.28 U9.12 | length 1234.3
  Top Layer w6: U9.12 835.68,1245.8 818.03,1245.8 762.6,1301.24 762.6,1553.15 1068.9,1859.45 1266.48,1859.45 P2.28
XCLR: U2.75 U9.4 | length 708.3
  Top Layer w6: U9.4 v1(1195.58,1268.58) ; v1(1438.98,1223.62) 1444.28,1228.93 1693.5,1228.93 v2(1712.99,1248.43)
  Bottom Layer w6: v1(1195.58,1268.58) 1394.02,1268.58 v1(1438.98,1223.62) ; v2(1712.99,1248.43) U2.75
XCLR3.3: P2.30 U9.11 | length 1051.5
  Top Layer w6: U9.11 922.52,1268.58 959.06,1305.12 959.06,1401.57 1520,1962.52 P2.30
pads on no net: P1.3 P1.4 P1.5 P1.6 P1.7 P1.8 P1.9 P1.10 P1.13 P1.14 P1.15 P1.16 P1.17 P1.18 P1.19 P1.22 P1.23 P1.24 P1.25 P1.26 P1.31 P1.32 P1.33 P1.34 P1.35 P1.36 P1.37 P1.38 P2.5 P2.6 P2.7 P2.8 P2.9 P2.10 P2.11 P2.12 P2.13 P2.14 P2.15 P2.16 P2.17 P2.18 P2.21 P2.22 P2.23 P2.24 P2.25 P2.26 P2.31 P2.32 U2.17 U2.18 U2.26 U2.49 U2.52 U2.54 U2.65 U2.76 U2.77 U2.78 U2.101 U2.102 U2.103 U2.104 U2.105 U2.109 U2.110 U2.111 U2.112 U2.113 U4.4 U6.2 U6.3 U6.46 U6.47 U7.4 U9.6 U9.9

## Polygon pours and split planes (outlines as drawn)
3.3V on Top Layer "3.3V" (solid, pour order 4): 2437.1,2231.97 2437.1,-3.03 -7.9,-3.03 -7.9,606.97 177.1,606.97 182.1,611.97 187.1,616.97 187.1,1606.97 -7.9,1606.97 -12.9,1611.97 -7.9,1616.97 -7.9,2231.97 2437.1,2231.97
GND on Bottom Layer "GND" (solid, pour order 5): -7.9,2231.97 -12.9,2226.97 -12.9,1611.97 182.1,1611.97 196,1609 196,609 -5.4,609.47 -7.9,606.97 -7.9,-3.03 2437.11,-3.03 2437.11,2231.97

## Keep-outs
Keep-Out Layer:
  lines w6: 0.35,2229.6 2438.93,2229.6 2439.65,2228.88 2439.65,1.41 2438.95,0.71 0.71,0.71 -0.71,-0.71 -0.71,602.64 196.17,602.64 197.23,603.7 197.23,1602.84 191.86,1608.21 0.35,1608.21 0.35,2229.6 ; 0.35,2229.6 0.35,2229.6

## Other copper
Top Layer:
  rectangle net GND: 2173.23,927.56 2213.39,1405.51
  rectangle net GND: 2015.27,922.44 2214.57,950.79
  rectangle net GND: 1979.13,939.37 2036.22,1054.72
  rectangle net GND: 1922.05,998.43 2038.98,1055.91
  rectangle net GND: 1938.58,1151.18 2035.43,1267.32
  rectangle net GND: 1556.69,955.51 1660.24,1202.76
  rectangle net 2.9V: 2056.69,962.6 2096.46,1348.82
  rectangle net 2.9V: 2020.87,1348.82 2098.43,1404.72
  rectangle net 1.2V: 1894.49,1062.99 1922.44,1317.32
  rectangle net 1.2V: 1794.49,989.76 1905.51,1036.61
  rectangle net 1.2V: 1677.95,1024.8 1899.61,1197.24
  rectangle net 1.2V: 1717.63,1029.76 1906.21,1187.24
  rectangle net GND: 1549.91,891.97 1581.41,986.45
  rectangle net GND: 1975.11,927.4 2038.1,990.39
  rectangle net GND: 1620.78,970.71 1664.08,1010.08
  region net GND: 1788.11,1018.5 1640.55,1018.5 1640.55,977.01 1788.11,977.01
  region net GND: 1996,1342.52 2050.51,1342.52 2050.51,1215.51 2048.42,1213.42 2040.74,1221.1 1969.26,1221.1 1969.26,1275.22 1996,1301.96
  region net GND: 1549.91,986.45 1502.67,939.21 1502.67,919.53 1526.29,895.9 1526.29,852.23 1536.86,845.16 1589.39,880.26 1644.4,935.27 1593.22,986.45
  region net 1.2V: 1892.43,1175.43 1876.68,1159.68
Bottom Layer:
  rectangle net GND: 1974.41,1227.95 2041.73,1333.86
  rectangle net GND: 1635.83,1224.8 1673.23,1242.91
  rectangle net GND: 1971.26,980.32 1987.4,1011.81
  rectangle net GND: 1974.02,1198.82 1992.13,1266.54
  rectangle net GND: 1655.91,1043.7 1697.24,1201.18
  rectangle net GND: 1624.02,980.71 1675.2,1012.2
  rectangle net GND: 1623.62,1003.15 1731.89,1053.94
  rectangle net GND: 1908.66,1043.7 1956.3,1082.68
  rectangle net GND: 1914.17,1002.36 1989.76,1052.76
  rectangle net GND: 1875.98,1066.54 1949.21,1147.64
  rectangle net GND: 1908.27,1106.69 1992.52,1211.02
  rectangle net GND: 1878.74,1194.49 1927.56,1242.52
  rectangle net 2.9V: 2020.87,1351.57 2090.94,1404.72
  rectangle net 2.9V: 2052.76,1201.57 2089.76,1385.83
  rectangle net 2.9V: 2007.48,1102.36 2070.47,1208.66
  rectangle net 2.9V: 2084.25,996.85 2131.5,1020.47
  rectangle net 2.9V: 2011.42,1031.5 2074.41,1051.18
  rectangle net 1.2V: 1746.46,1038.58 1868.11,1075.2
  rectangle net 1.2V: 1746.46,1029.13 1891.34,1053.15
  rectangle net 1.2V: 1845.28,1159.06 1897.64,1178.74
  rectangle net 1.2V: 1720.47,1064.57 1867.72,1178.74
  region net 2.9V: 2074.41,1051.18 2074.41,1098.43 2070.47,1102.36 2023.23,1102.36 2023.23,1096.4 2036.2,1083.44 2036.2,1064.15 2025.78,1053.73 2027.17,1052.34 2027.17,1051.18

## Silkscreen, mask and mechanical layers (free items; w line width, h text height)
Top Overlay:
  lines w6: 1822,1511 1822,1530 1826,1534 1910,1534 1915,1529 1915,1512 ; 1943,1320 1993.76,1320 1994.79,1321.03 1994.79,1384.09 ; 1998,1352 2102,1352 ; 2095,1715 2095,1728 2200,1728 2200,1715 ; 2101.8,1352.2 2289,1539.39 ; 2207,1542 2289,1542 2289,1616.38
Bottom Overlay:
  lines w10: 1387.63,1946.37 1423.06,1946.37 ; 1387.63,2179.57 1423.06,2179.57 ; 1423.06,1930.62 1423.06,1958.18 ; 1423.06,2167.76 1423.06,2195.32 ; 1516.95,1930.62 1516.95,1958.18 ; 1516.95,1946.37 1552.38,1946.37 ; 1516.95,2167.76 1516.95,2195.32 ; 1516.95,2179.57 1552.38,2179.57
  text "SCL" at 1056.32,2171.69 h30
  text "CLK_EN" at 1367.34,2167.76 h30
  text "OMODE" at 1705.92,2163.82 h30
  text "XCE" at 1370.2,1960.52 h30 r180
  text "XCLR" at 1680.38,1932.4 h30
  text "SDA" at 1055.05,1929.09 h30
  text "11/15 KL" at 76,1837.05 h25 r90
  text "3/15 OH" at 123.25,1837.05 h25 r90
  text "IMX291LQR-C-BBB" at 388.26,1609.14 h60 r90
  text "Adapter (v1)" at 284.25,1602.76 h60 r90
  text "INCK" at 1442.52,949.61 h15
  text "PIXCLK" at 2279.92,797.24 h15
  text "D3" at 1446.08,274.06 h30
  text "D3" at 1548.44,274.06 h30
  text "D8" at 2044.51,274.06 h30
  text "D6" at 2142.93,274.06 h30
  text "D4" at 2245.29,274.06 h30
  text "D2" at 2343.72,274.06 h30
  text "1" at 37.28,207.13 h25
  text "45" at 2418.52,203.19 h25
  text "2" at 36.63,108.7 h25 r358.87
  text "46" at 2422.46,100.83 h25 r358.86
  text "D10" at 1453.95,26.03 h30
  text "D11" at 1552.38,26.03 h30
  text "D9" at 2048.44,26.03 h30
  text "D7" at 2146.87,26.03 h30
  text "D5" at 2245.29,26.03 h30
  text "D3" at 2347.65,26.03 h30

## Text inside footprints (layer, text, board x,y; h text height)
P2: Bottom Overlay "2" at 36.63,1998.47 h25; Bottom Overlay "1" at 28.76,2116.58 h25; Bottom Overlay "31" at 1717.73,2104.77 h25; Bottom Overlay "32" at 1725.61,2006.34 h25